# EAGLE board Open Ephys EIB Omnetics 1x32 2 fibers (EAGLE 6.3)
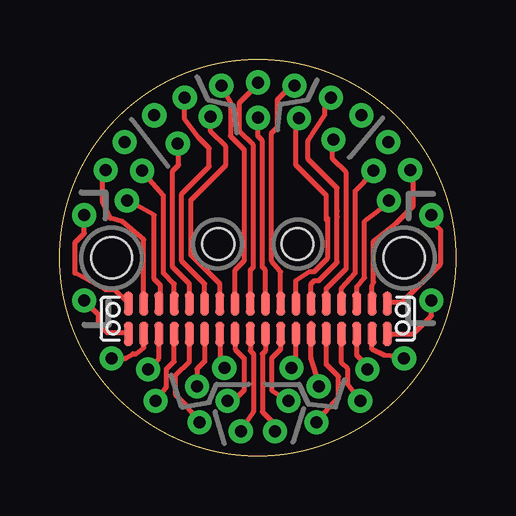
[diagram p0: board, top side]
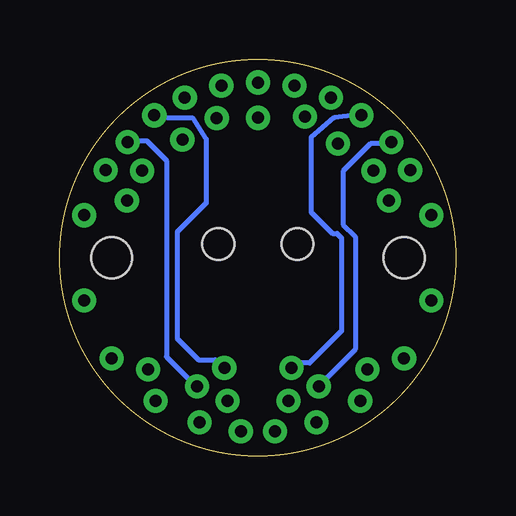
[diagram p1: board, bottom side, seen from below]

Size 16.51 x 16.51 mm. Coordinates in mm from the lower left corner, seen from the top.
Outline: circle at 8.26,8.26 radius 8.26
Copper layers (1*16): Top 0.035mm / dielectric 1.5mm / Bottom 0.035mm
Design rules "Fusion_eagle_rule_v1.1": minimum track width 6mil, minimum drill 12mil, track to track 6mil, track to pad 6mil, pad to pad 6mil, via to via 6mil, smd to smd 0mil, copper to edge 10mil, drill to drill 10mil, minimum pad ring 10mil, minimum via ring 6mil, stop-mask expansion 2mil, vias tented up to drill 100mil, thermal gap 10mil
Holes 1.32 mm at 6.6,8.83 9.91,8.83
Holes 1.7 mm at 2.16,8.26 14.35,8.26

## Footprints (pad centres in the part's own frame; a part is rotated, then mirrored left to right if it is on the bottom)
NPD-36-VV-GS = smd 0.381 x 1.016: P$1 0,0; P$2 0.635,0; P$3 1.27,0; P$4 1.905,0; P$5 2.54,0; P$6 3.175,0; P$7 3.81,0; P$8 4.445,0; P$9 5.08,0; P$10 5.715,0; P$11 6.35,0; P$12 6.985,0; P$13 7.62,0; P$14 8.255,0; P$15 8.89,0; P$16 9.525,0; P$17 10.16,0; P$18 10.795,0; P$19 10.795,1.27; P$20 10.16,1.27; P$21 9.525,1.27; P$22 8.89,1.27; P$23 8.255,1.27; P$24 7.62,1.27; P$25 6.985,1.27; P$26 6.35,1.27; P$27 5.715,1.27; P$28 5.08,1.27; P$29 4.445,1.27; P$30 3.81,1.27; P$31 3.175,1.27; P$32 2.54,1.27; P$33 1.905,1.27; P$34 1.27,1.27; P$35 0.635,1.27; P$36 0,1.27
LARGEGOLDPIN = drill 0.5: P1 0,0

## Placement (x,y rotation side)
E$1  [NPD-36-VV-GS]  2.86,5.08 0 top
S$41  GOLDPINLARGE  [LARGEGOLDPIN]  12.83,3.61 0 top
U$1  GOLDPINLARGE  [LARGEGOLDPIN]  15.49,10.03 0 top
U$2  GOLDPINLARGE  [LARGEGOLDPIN]  1.02,6.48 0 top
U$3  GOLDPINLARGE  [LARGEGOLDPIN]  1.91,11.91 0 top
U$4  GOLDPINLARGE  [LARGEGOLDPIN]  13.69,13.08 0 top
U$5  GOLDPINLARGE  [LARGEGOLDPIN]  2.69,13.08 0 top
U$6  GOLDPINLARGE  [LARGEGOLDPIN]  3.43,11.89 0 top
U$7  GOLDPINLARGE  [LARGEGOLDPIN]  6.73,15.44 0 top
U$8  GOLDPINLARGE  [LARGEGOLDPIN]  10.8,2.9 0 top
U$9  GOLDPINLARGE  [LARGEGOLDPIN]  4.91,13.02 0 top
U$10  GOLDPINLARGE  [LARGEGOLDPIN]  9.53,2.29 0 top
U$11  GOLDPINLARGE  [LARGEGOLDPIN]  8.26,14.1 0 top
U$12  GOLDPINLARGE  [LARGEGOLDPIN]  9.78,15.44 0 top
U$13  GOLDPINLARGE  [LARGEGOLDPIN]  10.69,1.4 0 top
U$14  GOLDPINLARGE  [LARGEGOLDPIN]  9.97,14.08 0 top
U$15  GOLDPINLARGE  [LARGEGOLDPIN]  15.49,6.48 0 top
U$16  GOLDPINLARGE  [LARGEGOLDPIN]  14.61,11.91 0 top
U$17  GOLDPINLARGE  [LARGEGOLDPIN]  13.08,11.89 0 top
U$18  GOLDPINLARGE  [LARGEGOLDPIN]  11.3,14.94 0 top
U$19  GOLDPINLARGE  [LARGEGOLDPIN]  2.79,10.64 0 top
U$20  GOLDPINLARGE  [LARGEGOLDPIN]  3.68,3.61 0 top
U$21  GOLDPINLARGE  [LARGEGOLDPIN]  13.72,10.64 0 top
U$22  GOLDPINLARGE  [LARGEGOLDPIN]  11.4,13.18 0 top
U$23  GOLDPINLARGE  [LARGEGOLDPIN]  12.52,2.29 0 top
U$24  GOLDPINLARGE  [LARGEGOLDPIN]  5.72,2.9 0 top
U$25  GOLDPINLARGE  [LARGEGOLDPIN]  12.57,14.2 0 top
U$26  GOLDPINLARGE  [LARGEGOLDPIN]  3.99,2.29 0 top
U$27  GOLDPINLARGE  [LARGEGOLDPIN]  6.29,14.15 0 top
U$29  GOLDPINLARGE  [LARGEGOLDPIN]  5.21,14.94 0 top
U$30  GOLDPINLARGE  [LARGEGOLDPIN]  1.02,10.03 0 top
U$31  GOLDPINLARGE  [LARGEGOLDPIN]  6.86,3.67 0 top
U$32  GOLDPINLARGE  [LARGEGOLDPIN]  5.82,1.4 0 top
U$33  GOLDPINLARGE  [LARGEGOLDPIN]  7.54,1.02 0 top
U$34  GOLDPINLARGE  [LARGEGOLDPIN]  6.99,2.29 0 top
U$35  GOLDPINLARGE  [LARGEGOLDPIN]  8.97,1.02 0 top
U$36  GOLDPINLARGE  [LARGEGOLDPIN]  9.65,3.67 0 top
U$37  GOLDPINLARGE  [LARGEGOLDPIN]  3.94,14.2 0 top
U$38  GOLDPINLARGE  [LARGEGOLDPIN]  14.35,4.06 0 top
U$39  GOLDPINLARGE  [LARGEGOLDPIN]  8.26,15.57 0 top
U$40  GOLDPINLARGE  [LARGEGOLDPIN]  2.16,4.06 0 top

## Library data of the parts
E$1 = omnetics
S$41 U$1-U$27 U$29-U$40 = josh

## Nets
N$12: U$29.P1
N$23: U$8.P1
N$25: U$10.P1
N$28: U$13.P1
N$29: U$14.P1
N$31: U$16.P1
S$28: E$1.P$9

## Tracks (layer width: path | path; a pad name or v marks a point on that pad's centre or on a via)
S$1
  Top 0.203: 7.94,6.41 7.94,7.75 8.06,7.87 8.06,12.95 7.49,13.53 7.49,14.73 8.32,15.56
S$2
  Top 0.203: 8.57,6.48 8.57,7.75 8.45,7.87 8.45,13.15 8.26,13.34 8.26,14.1
S$3
  Top 0.203: 9.21,6.41 9.21,7.68 8.83,8.13 8.83,13.46 9.08,13.72 9.08,14.86 9.72,15.49
S$4
  Top 0.203: 11.94,10.1 11.94,11.81 11.37,12.38 11.37,13.15 11.43,13.21
S$6
  Top 0.203: 9.84,6.54 9.84,7.3 10.41,7.68 10.61,7.68 11.18,8.26 11.18,9.91
S$9
  Top 0.203: 10.41,6.48 10.48,6.54 10.48,7.18 10.61,7.3 10.8,7.3 11.56,8.06 11.56,10.22
S$10
  Top 0.203: 11.18,6.67 11.11,6.6 11.11,6.99 11.94,7.81 11.94,10.48
S$11
  Top 0.203: 11.75,6.54 11.75,6.6 11.75,6.99 12.32,7.62 12.32,11.05 13.08,11.81
S$12
  Top 0.203: 12.38,6.6 12.38,7.05 12.7,7.43 12.7,9.78
S$13
  Top 0.203: 13.78,6.41 14.29,6.41 15.88,8 15.88,9.4 15.49,9.78 15.49,10.1
S$14
  Top 0.203: 13.78,5.02 13.84,5.08 14.73,5.08 15.49,5.84 15.49,6.54
S$15
  Top 0.203: 2.79,6.41 2.29,6.92 1.91,6.92 0.64,7.62 0.64,8.89 1.02,9.27 1.02,10.03
S$16
  Top 0.203: 1.02,6.48 1.59,5.91 1.59,5.52 1.97,5.14 2.86,5.14 2.92,5.08
S$18
  Top 0.203: 13.02,6.35 13.02,7.11 13.08,7.24 13.08,8.95 14.03,9.72 14.73,10.41 14.73,11.88 14.67,11.94
S$19
  Top 0.203: 6.67,6.41 6.67,7.18 5.46,8.38 5.46,10.67 6.92,12.13 6.92,12.89 6.29,13.53 6.29,14.03
S$20
  Top 0.203: 6.03,6.67 6.03,7.18 5.08,8.13 5.08,10.92 6.22,12.07 6.22,12.83 5.78,13.27 5.21,14.03 5.21,14.92
S$21
  Top 0.203: 5.4,6.73 5.4,7.18 4.7,7.87 4.7,11.88 4.95,12.13 4.95,13.02 4.76,13.08
S$22
  Top 0.203: 4.76,6.73 4.76,7.18 4.32,7.62 4.32,10.86 3.43,11.88
S$23
  Top 0.203: 4.19,6.6 4.19,7.11 3.94,7.37 3.94,10.03 2.79,10.67
S$24
  Top 0.203: 3.49,6.48 3.49,9.02 2.6,9.78 2.1,9.91 1.78,10.61 1.78,11.81
S$26
  Top 0.203: 14.41,4 14.29,4.13 13.53,4.19 13.02,4.45 13.02,5.21
S$27
  Top 0.203: 7.94,5.02 7.94,4.38 8.06,4.25 8.06,1.84 7.56,1.08 7.56,1.02
S$29
  Top 0.203: 8.51,5.08 8.57,5.02 8.57,4.38 8.45,4.25 8.45,1.84 8.95,1.33 8.95,0.89
S$30
  Top 0.203: 7.3,4.95 7.3,4.45 7.68,4.06 7.68,2.73 7.3,2.35 6.99,2.35
S$31
  Top 0.203: 9.21,4.95 9.21,4.45 8.83,4.06 8.83,2.73 9.53,2.29
S$32
  Top 0.203: 6.67,4.89 6.67,3.81 6.86,3.62
S$33
  Top 0.203: 9.65,3.62 9.65,3.81 9.84,4 9.84,5.02 9.91,5.08
S$34
  Top 0.203: 6.03,5.02 6.03,3.94 5.72,3.62 5.72,2.99 5.65,2.92
S$35
  Top 0.203: 5.84,1.4 5.27,2.1 4.83,2.54 4.83,3.37 5.4,3.94 5.4,4.95 5.33,5.02
S$36
  Top 0.203: 4.06,2.16 4,2.35 4.45,2.86 4.45,3.62 4.76,3.94 4.76,5.33
S$37
  Top 0.203: 3.62,3.56 4.13,4.06 4.13,5.02 4.19,5.08
S$38
  Top 0.203: 10.86,2.99 10.8,3.05 10.48,4.06 10.48,5.52
S$39
  Top 0.203: 10.67,1.4 11.43,2.22 11.62,2.41 11.62,3.3 11.11,3.81 11.11,5.14 11.05,5.21
S$40
  Top 0.203: 2.22,4.06 2.73,4.06 3.05,4.25 3.18,4.25 3.49,4.51 3.49,5.14
S$41
  Top 0.203: 12.7,3.68 12.7,3.87 12.38,4.19 12.38,5.27 12.32,5.33
S$42
  Top 0.203: 12.57,2.22 12,2.99 12,3.62 11.75,3.87 11.75,5.27
S$43
  Top 0.203: 6.73,15.43 6.73,15.37 7.11,14.73 7.11,13.34 7.68,12.76 7.68,8.13 7.3,7.75 7.3,6.35
S$44
  Top 0.203: 12.76,9.84 13.78,10.61
S$45
  Bottom 0.203: 13.65,13.15 12.89,13.15 12.07,12.32 12.07,4.13 10.8,2.86
S$46
  Top 0.203: 11.11,9.84 11.11,10.86 9.84,12.13 9.84,13.84 9.97,14.03
S$47
  Top 0.203: 11.56,9.97 11.56,11.18 10.35,12.38 10.35,13.15 11.05,14.22 11.05,14.73 11.18,14.86
S$48
  Bottom 0.203: 4,14.22 5.08,14.1 6.03,13.27 6.03,10.16 5.14,9.27 4.95,9.27 4.76,9.08 4.76,5.21 6.1,3.87 6.67,3.87 6.86,3.68
S$49
  Bottom 0.203: 12.57,14.22 12,14.1 10.99,14.1 10.41,13.21 10.41,10.54 11.62,9.34 11.62,4.89 10.73,4 10.03,4 9.72,3.68
S$50
  Bottom 0.203: 2.79,13.02 3.56,13.02 4.7,11.88 4.7,9.65 4.19,9.14 4.19,4.45 5.72,2.92

## Text on the board
tDocu: open- / ephys / .org